# EAGLE board dc-butt-barrel-mk-1.0 (EAGLE 6.5.0)
VERSION: v1.0
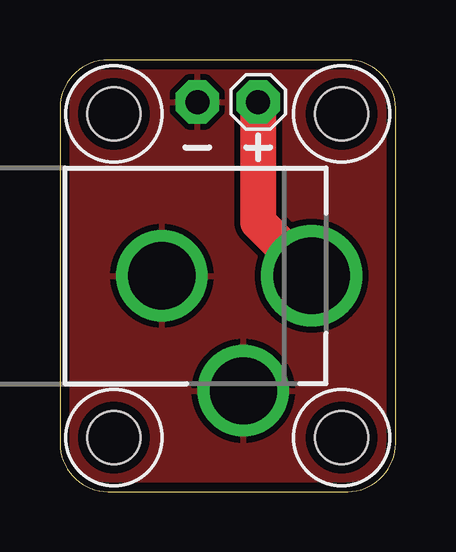
[diagram p0: board, top side]
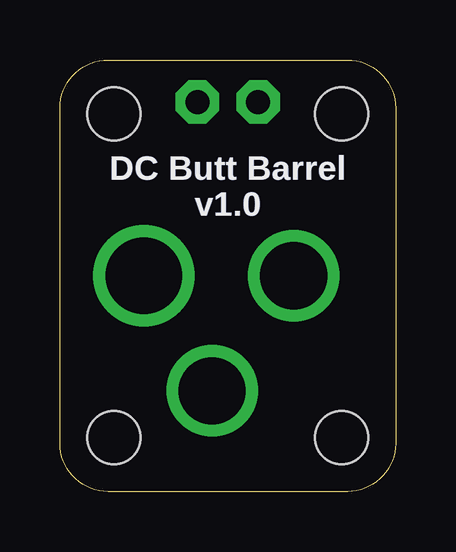
[diagram p1: board, bottom side, seen from below]

Size 14 x 18 mm. Coordinates in mm from the lower left corner, seen from the top.
Outline: 0,16 0,2 arc90 2,0 12,0 arc90 14,2 14,16 arc90 12,18 2,18 arc90 0,16
Copper layers (1*16): Top 0.0356mm / dielectric 1.5011mm / Bottom 0.0356mm
Design rules "LaenPCBOrder_2": minimum track width 6mil, minimum drill 13mil, track to track 6mil, track to pad 6mil, pad to pad 6mil, via to via 6mil, smd to smd 6mil, copper to edge 15mil, drill to drill 6mil, minimum pad ring 7mil, minimum via ring 7mil, stop-mask expansion 3mil, vias tented up to drill 20mil, thermal gap 10mil
Holes 2.2 mm at 2.25,15.75 2.25,2.25 11.75,15.75 11.75,2.25

## Footprints (pad centres in the part's own frame; a part is rotated, then mirrored left to right if it is on the bottom)
1X02-CENTER-R+ = drill 1 pad 1.8 octagon: 1 -1.27,0; 2 1.27,0
DCJACK_2MM_PTH = drill 2.8: BRK -4.8,2.85; GND 0,6.25 | drill 3.2: PWR 0,0

## Placement (x,y rotation side)
FRAME1  FRAME-LETTERNO_PACKAGE  [DUMMY]  0,0 0 top
JP1  M02PTH-CENTERED-R+  [1X02-CENTER-R+]  7,16.25 0 top
PWR1  DCBARRELPTH  [DCJACK_2MM_PTH]  10.5,9 90 top

## Library data of the parts
FRAME1 = A_butts; DESIGNER: sean@yak.net; VERSION: v1.0
JP1 PWR1 = a_parts

## Nets
GND: JP1.1 PWR1.BRK PWR1.GND
VIN: JP1.2 PWR1.PWR

## Tracks (layer width: path | path; a pad name or v marks a point on that pad's centre or on a via)
GND
  pour Top (isolate 0.25): 14,0 0,0 0,18 14,18
VIN
  Top 1.5: JP1.2 8.27,11.23 PWR1.PWR

## Text on the board
Bottom: DC Butt Barrel
bPlace: DC Butt Barrel